# Altium PCB PCB2.PcbDoc
Units mil, origin at the board's own origin, x right, y up, seen from the top; angles counter-clockwise.
Board outline 4745 x 4000 mil, 2 copper layers (Top Layer, Bottom Layer); 73 components, 53 nets, 225 pads, 21 vias.
Unrouted connection lines stored in the file: 1.
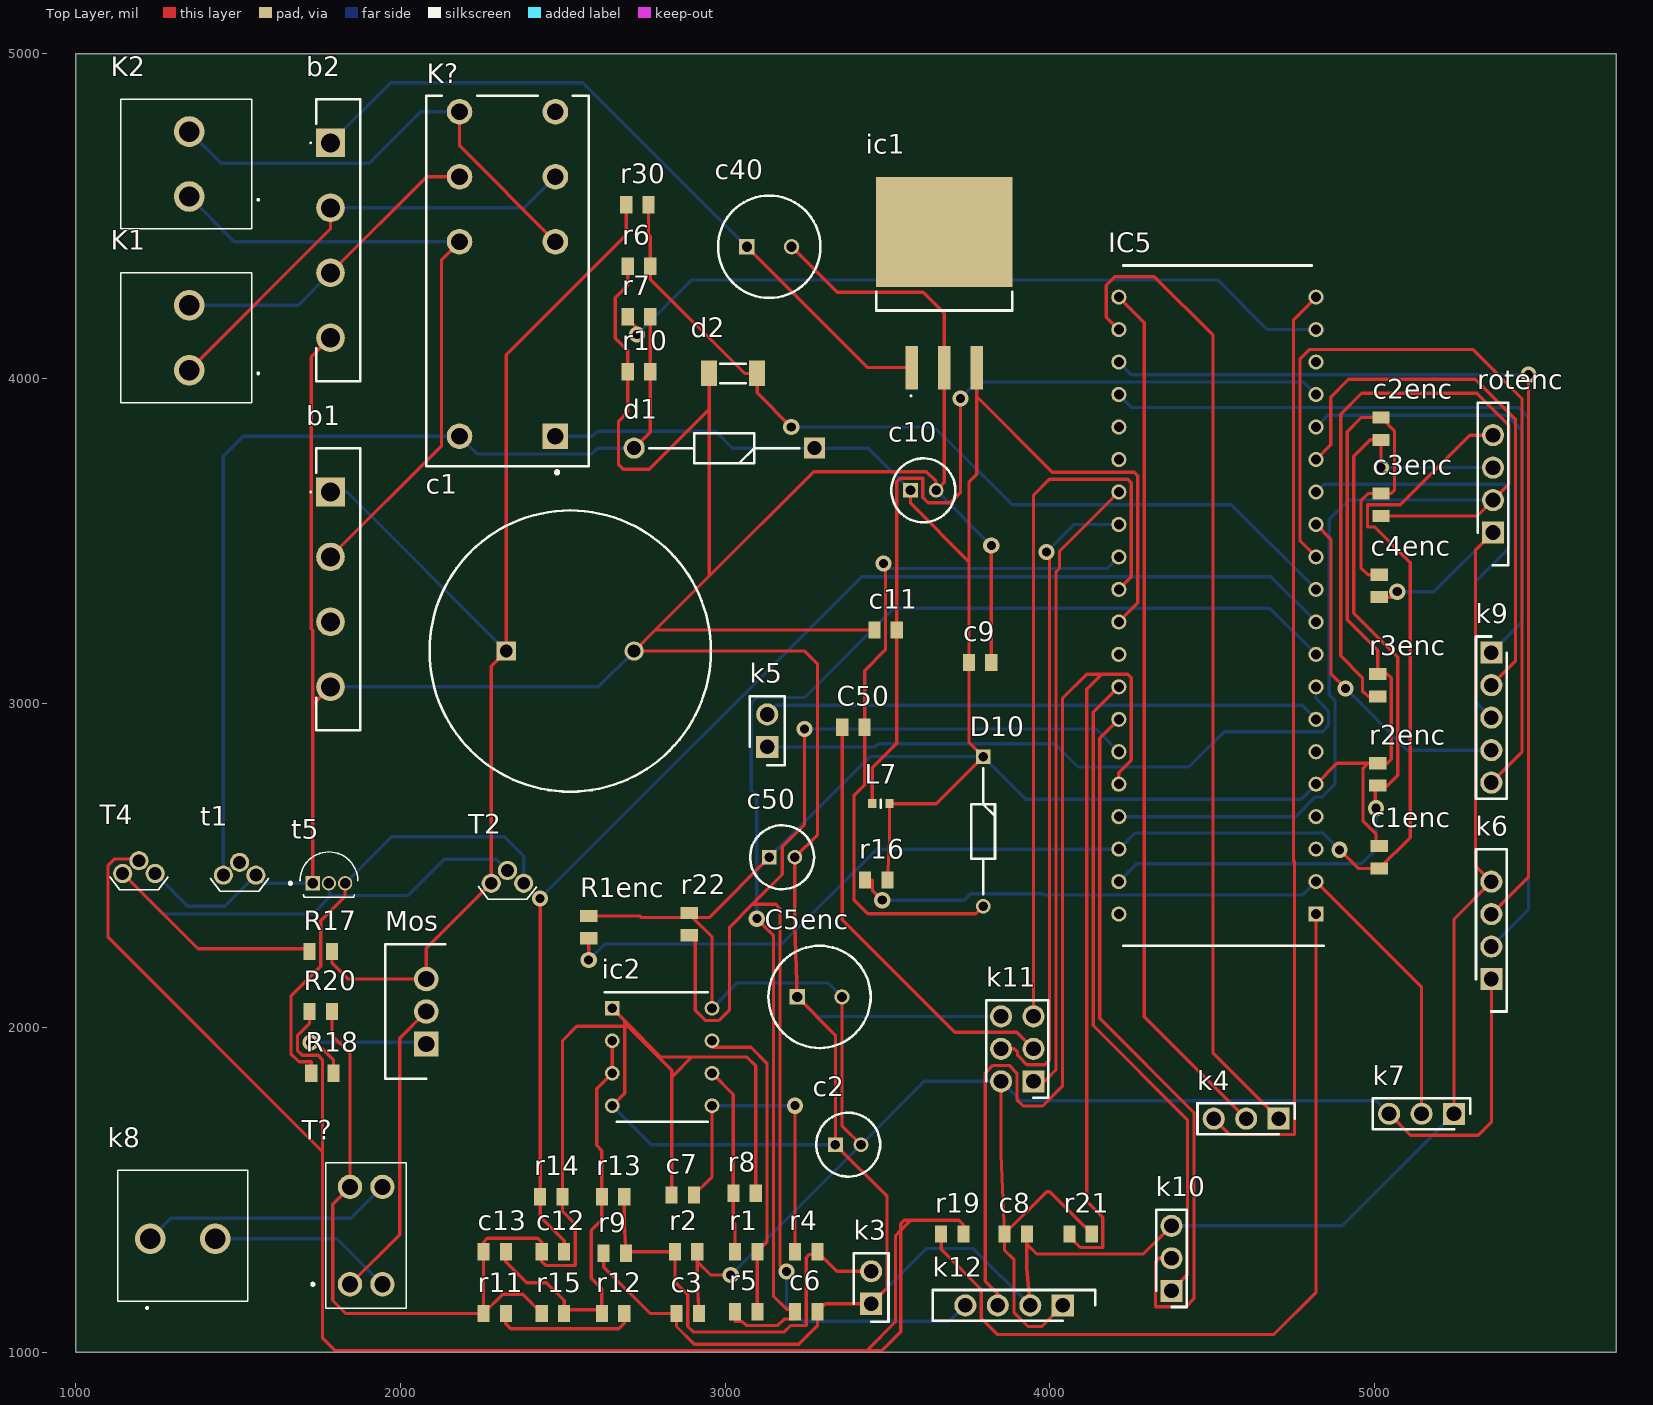
[diagram p0: Top Layer view]
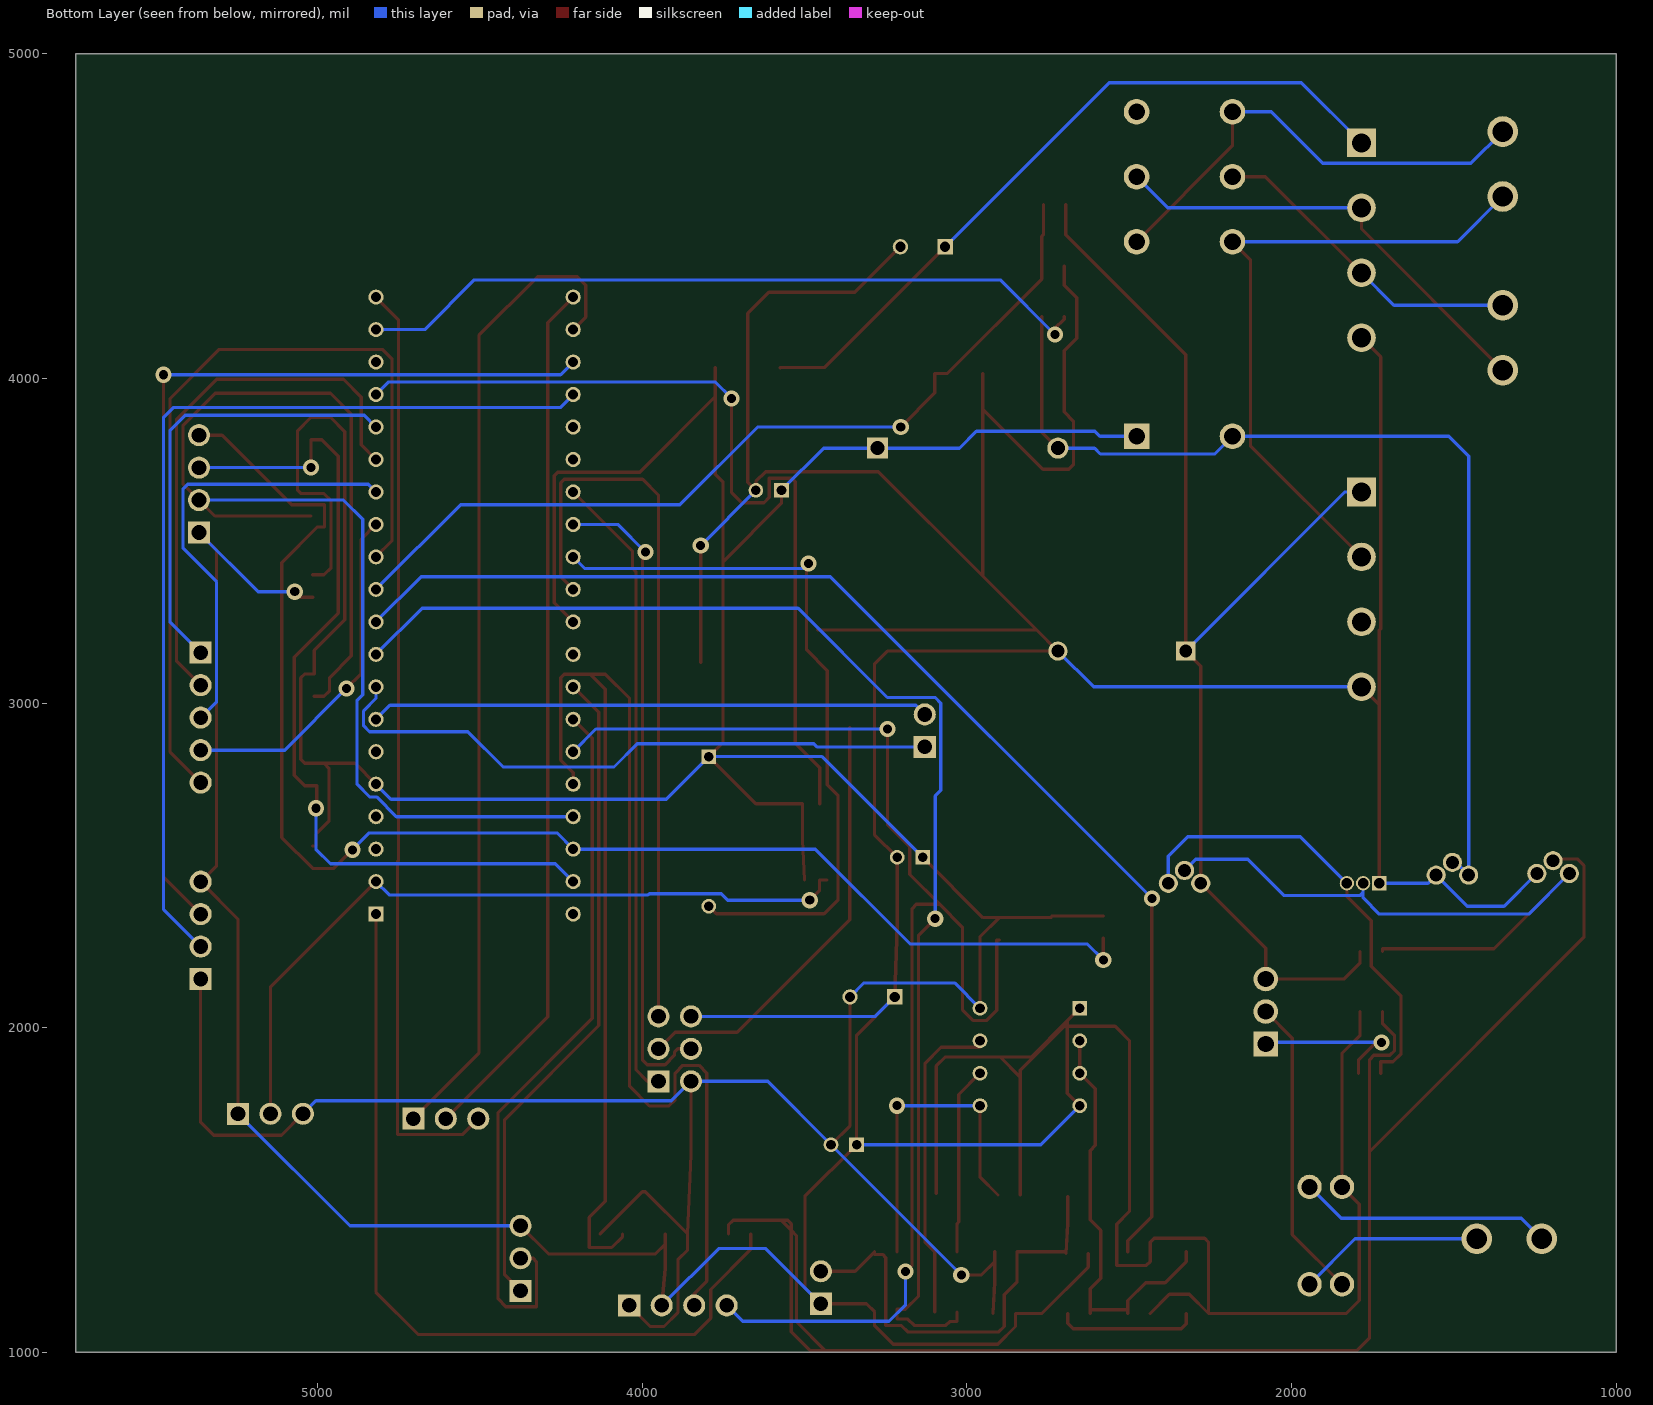
[diagram p1: Bottom Layer view, seen from below]
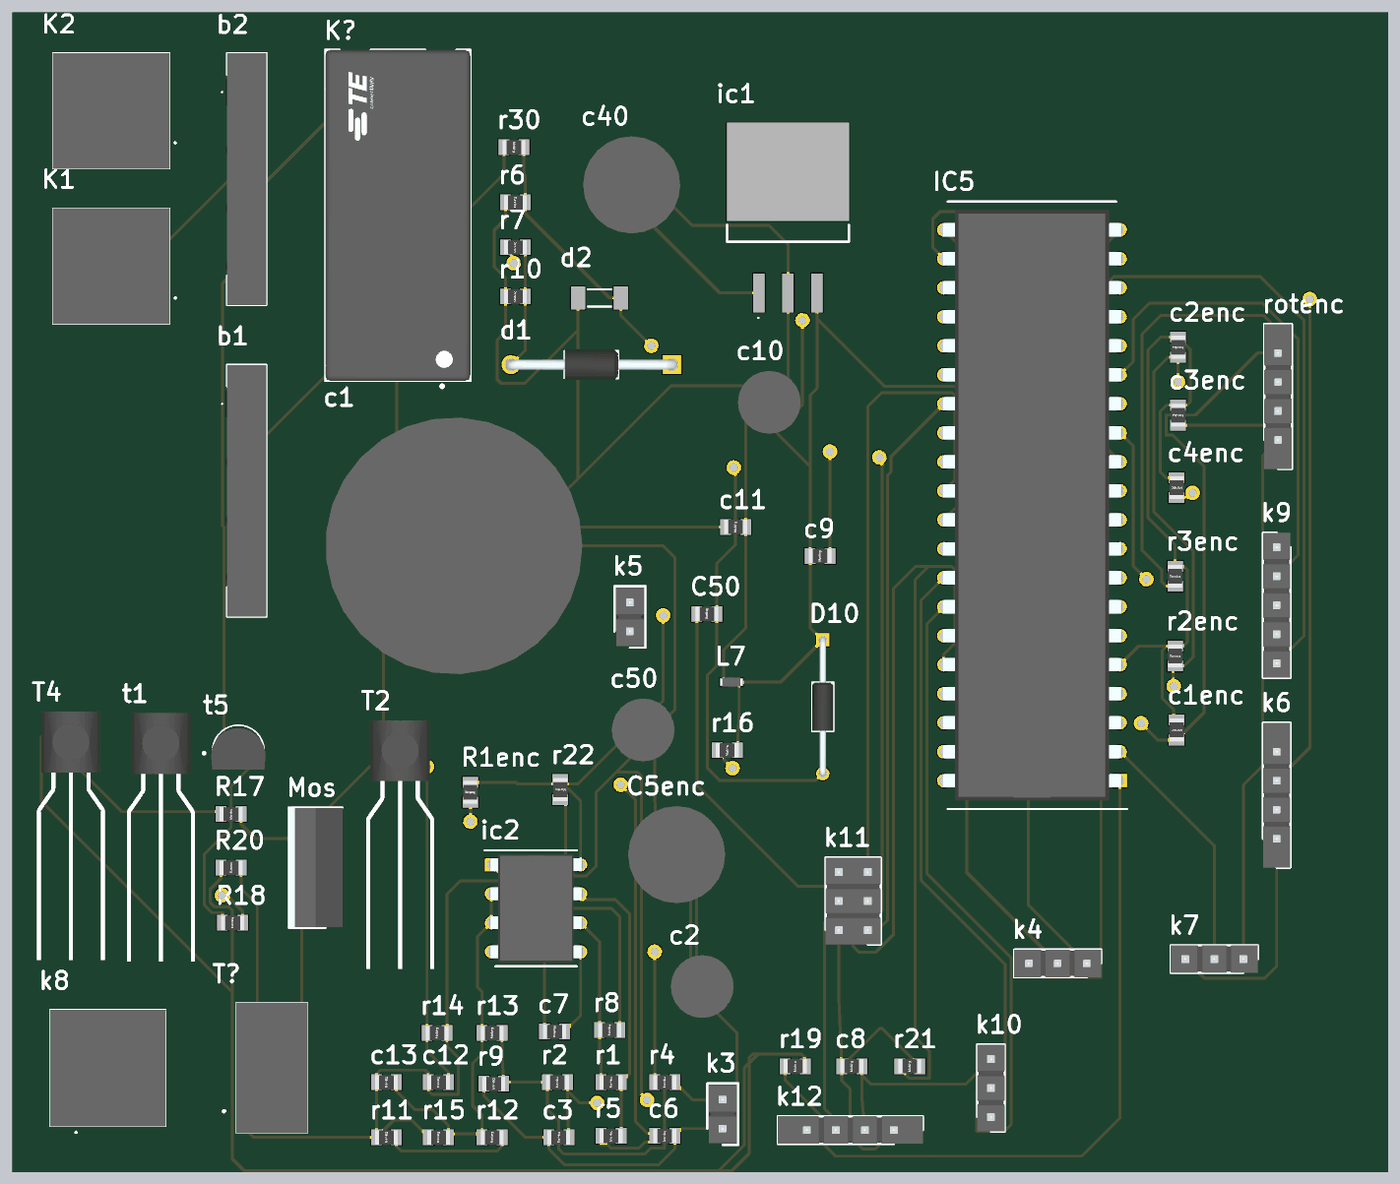
[diagram p2: 3D render of the assembled board from above, using the file's embedded part models]

## Layer stack, top to bottom
Top Solder: solder mask 0.4, Solder Resist, Dk 3.5
Top Layer: signal copper 1.4
Dielectric 1: dielectric 12.6, FR-4, Dk 4.8
Bottom Layer: signal copper 1.4
Bottom Solder: solder mask 0.4, Solder Resist, Dk 3.5

## Board outline
1000,1000 5745,1000 5745,5000 1000,5000

## Design rules (kind name [scope] priority, off if disabled: settings)
Clearance [All] p1: gap=10 ignorepadtopadclearanceinfootprint=FALSE except(0: Arc-Hole Track-Hole SMDPad-Hole THPad-Hole Via-Hole Fill-Hole Poly-Hole Region-Hole Text-Hole)
PolygonConnect [All] p1: connectstyle=Relief reliefconductorwidth=10 reliefentries=4 polygonreliefangle="90 Angle" airgapwidth=10
RoutingVias [All] p1: holewidth=28 width=50 viastyle="Through Hole" minholewidth=28 minwidth=50 maxholewidth=28 maxwidth=50
SolderMaskExpansion [All] p1: expansion=4 istentingtop=FALSE
Width [All] p1: maxlimit=10 minlimit=10 preferedwidth=10
30 further rules are at their usual default settings.

## Classes and differential pairs
component class deel4: c1enc c2enc c3enc c4enc C5enc c8 c9 c10 c11 C50 D10 IC5 k4 k5 k6 k7 k9 k10 k11 k12 L7 R1enc r2enc r3enc r16 r19 r21 r22 rotenc
component class deel3: c2 c3 c6 c7 c12 c13 ic2 k3 r1 r2 r4 r5 r8 r9 r11 r12 r13 r14 r15
component class deel2: b1 b2 c1 c40 c50 d1 d2 ic1 K1 K2 K? r6 r7 r10 r30 t1
component class deel1: k8 Mos R17 R18 R20 T2 T4 t5 T?

## Components (designator, comment, footprint, x,y, rotation, side; value= is the part's Value field where it differs from the comment)
b1 "bruggelijk" bruggelijk 1785,3650 r90 top
b2 "bruggelijk" bruggelijk 1785,4725 r90 top
c1 "elekcap4700uf" Elekcap4700uf 2326.3,3160 r0 top
c1enc "" 0805 5015,2525 r90 top
c2 "elekcap10uf" elekcap10uf 3340,1640 r0 top
c2enc "" 0805 5020,3845 r90 top
c3 "keramishecap" 0805 2885,1120 r0 top
c3enc "" 0805 5020,3610.55 r90 top
c4enc "" 0805 5015,3360.55 r90 top
C5enc "" elekcap100uf 3222.2,2095 r0 top
c6 "keramishecap" 0805 3250,1125 r0 top
c7 "keramishecap" 0805 2870,1485 r180 top
c8 "keramishecap" 0805 3895,1365 r0 top
c9 "keramishecap" 0805 3785.55,3125 r0 top
c10 "elekcap10uf" elekcap10uf 3571.26,3655 r0 top
c11 "keramishecap" 0805 3494.45,3225 r0 top
c12 "keramishecap" 0805 2470,1310 r0 top
c13 "keramishecap" 0805 2290.55,1310 r0 top
c40 "elekcap100uf" elekcap100uf 3067.2,4405 r0 top
C50 "keramishecap" 0805 3395.55,2925 r0 top (schematic designator C?)
c50 "elekcap10uf" elekcap10uf 3136.26,2525 r0 top
d1 "1N4007-B" 1n4007 3275.12,3785 r180 top
d2 "zenerdiode" zenerdiode 3025,4015 r180 top
D10 "1N4148" diode1N4148 3795,2835 r270 top (schematic designator D?)
ic1 "dcconv5v" dcconv5v 3675,4298.23 r0 top
ic2 "dualopam" dualopam 2806.26,1910 r0 top
IC5 "8bitmcu" 8bitmcu 4516.26,3300 r180 top (schematic designator IC?)
K1 "printkroonsteen" printkroonsteen 1350,4025 r90 top
K2 "printkroonsteen" printkroonsteen 1350,4560 r90 top
k3 "2pin" 2pin 3450,1150 r90 top
k4 "3pin" 3pin 4705,1720 r180 top
k5 "2pin" 2pin 3130,2865 r90 top
k6 "4pin" 4pin 5360,2150 r90 top
k7 "3pin" 3pin 5245,1735 r180 top
k8 "printkroonsteen" printkroonsteen 1230,1350 r0 top
k9 "5pin" 5pin 5360,3155 r270 top
k10 "3pin" 3pin 4375,1190 r90 top
k11 "6pin" 6pin 3950,1835 r90 top
k12 "display" 4pin 4040,1145 r180 top
K? "RT424005F" FP-RT424005F-MFG 2330,4300 r90 top
L7 "Smoorspoel" Smoorspoel 3480,2690 r0 top (schematic designator L?)
Mos "pmosfet" pmosfet 2080,1950 r90 top
r1 "18k" 0805 3065,1310 r0 top
R1enc "5mOhm" 0805 2580,2310 r90 top
r2 "1m" 0805 2880,1310 r0 top
r2enc "5mOhm" 0805 5010,2780 r90 top
r3enc "5mOhm" 0805 5010,3055 r90 top
r4 "5k6" 0805 3250,1310 r0 top
r5 "5k6" 0805 3065,1125 r0 top
r6 "10k" 0805 2735,4345 r0 top
r7 "10k" 0805 2735,4190 r0 top
r8 "100" 0805 3060,1490 r0 top
r9 "10m" 0805 2660.55,1305 r0 top
r10 "4k7" 0805 2735,4020 r0 top
r11 "18k" 0805 2290.55,1120 r0 top
r12 "18k" 0805 2655,1120 r0 top
r13 "5k6" 0805 2655,1480 r0 top
r14 "5k6" 0805 2465,1480 r0 top
r15 "100" 0805 2470,1120 r0 top
r16 "4k7" 0805 3465.55,2455 r0 top
R17 "4k7" 0805 1755,2235 r0 top
R18 "100" 0805 1760,1860 r0 top
r19 "10k" 0805 3700,1365 r0 top
R20 "4k7" 0805 1755,2050 r180 top
r21 "4k7" 0805 4095,1365 r0 top
r22 "4k7" 0805 2890,2319.45 r90 top
r30 "68k" 0805 2730,4535 r180 top
rotenc "4pin" 4pin 5365,3525 r90 top
t1 "" bc447 1455,2470 r0 top
T2 "BC547CTA" bc447 2280,2445 r0 top
T4 "BC547CTA" bc447 1145,2475 r0 top
t5 "BC557C" bc557c 1780,2445 r0 top
T? "Commonmodespoel" commonmodespoel 1845,1210 r0 top

## Footprints (in the part's own frame and the unit in brackets; to place one, negate y for a bottom-side part, rotate by r counter-clockwise, add the part's x,y. Pads: shape width x height; smd on the part's side, far side on the other; paste and mask are expansions set on the pad)
1n4007 [mm]
  rect 1.65x1.65 hole 1.1: 1(0,0)
  round 1.65 hole 1.1: 2(14.1,0)
  silkscreen extent 1.18,-1.18 12.92,1.18, body extent -0.45,-1.35 14.55,1.35, height 2.69
2pin [mm]
  rect 1.725x1.725 hole 1.15: 1(0,0)
  round 1.725 hole 1.15: 2(2.54,0)
  silkscreen extent -1.42,-1.35 3.96,1.35, body extent -1.27,-1.2 3.81,1.2, height 8.43
3pin [mm]
  rect 1.725x1.725 hole 1.15: 1(0,0)
  round 1.725 hole 1.15: 2(2.54,0) 3(5.08,0)
  silkscreen extent -1.27,-1.2 6.35,1.2, body extent -1.27,-1.2 6.35,1.2, height 8.58
4pin [mm]
  rect 1.725x1.725 hole 1.15: 1(0,0)
  round 1.725 hole 1.15: 2(2.54,0) 3(5.08,0) 4(7.62,0)
  silkscreen extent -2.54,-1.2 10.16,1.2, body extent -2.54,-1.2 10.16,1.2, height 8.58
5pin [mm]
  rect 1.725x1.725 hole 1.15: 1(0,0)
  round 1.725 hole 1.15: 2(2.54,0) 3(5.08,0) 4(7.62,0) 5(10.16,0)
  silkscreen extent -1.27,-1.2 11.43,1.2, body extent -1.27,-1.2 11.43,1.2, height 8.58
6pin [mm]
  rect 1.725x1.725 hole 1.15: 1(0,0)
  round 1.725 hole 1.15: 2(0,2.54) 3(2.54,0) 4(2.54,2.54) 5(5.08,0) 6(5.08,2.54)
  silkscreen extent -1.27,-1.14 6.35,3.68, body extent -1.27,-1.14 6.35,3.68, height 8.58
8bitmcu [mm]
  rect 1.184x1.184 hole 0.784: 1(-7.715,24.13)
  round 1.184 hole 0.784: 2(-7.715,21.59) 3(-7.715,19.05) 4(-7.715,16.51) 5(-7.715,13.97) 6(-7.715,11.43) 7(-7.715,8.89) 8(-7.715,6.35) 9(-7.715,3.81) 10(-7.715,1.27) 11(-7.715,-1.27) 12(-7.715,-3.81) 13(-7.715,-6.35) 14(-7.715,-8.89) 15(-7.715,-11.43) 16(-7.715,-13.97) 17(-7.715,-16.51) 18(-7.715,-19.05) 19(-7.715,-21.59) 20(-7.715,-24.13) 21(7.715,-24.13) 22(7.715,-21.59) 23(7.715,-19.05) 24(7.715,-16.51) 25(7.715,-13.97) 26(7.715,-11.43) 27(7.715,-8.89) 28(7.715,-6.35) 29(7.715,-3.81) 30(7.715,-1.27) 31(7.715,1.27) 32(7.715,3.81) 33(7.715,6.35) 34(7.715,8.89) 35(7.715,11.43) 36(7.715,13.97) 37(7.715,16.51) 38(7.715,19.05) 39(7.715,21.59) 40(7.715,24.13)
  silkscreen extent -8.31,-26.61 7.37,26.61, body extent -7.86,-25.88 7.86,25.88, height 6.35
0805 [mm] "Metal Plate Resistor, SMT, body size 2x1.25mm"
  rect 0.95x1.36 smd: 1(-0.875,0) 2(0.875,0)
  body extent -1,-0.62 1,0.63, height 0.35
bc447 [mm]
  round 1.5 hole 1.01: 1(0,0) 2(1.27,1) 3(2.54,0)
  silkscreen extent -1.02,-1.26 3.56,-0.24, body extent -1.51,-18.89 4.44,2.88, height 2.6
bc557c [mm]
  rect 1.12x1.12 hole 0.83: 1(-1.27,0)
  round 1.12 hole 0.83: 2(0,0) 3(1.27,0)
  silkscreen extent -3.11,-1.11 2.26,2.45, body extent -2.38,-1.43 2.38,2.19, height 5.33
bruggelijk [mm]
  rect 2.235x2.235 hole 1.49: 1(0,0)
  round 2.235 hole 1.49: 2(-5.08,0) 3(-10.16,0) 4(-15.24,0)
  silkscreen extent -18.65,-2.32 3.41,1.6, body extent -18.65,-2.32 3.4,1.11, height 18.9
commonmodespoel [mil]
  round 75 hole 50: 1(0,0) 2(100,0) 3(100,300) 4(0,300)
  silkscreen extent -118,-74 174,374, body extent -74,-74 174,374, height 378
dcconv5v [mm]
  rect 1x3.4 smd: 1(-2.54,-6.745) 2(0,-6.745) 3(2.54,-6.745)
  rect 10.7x8.6 smd: 4(0,3.855)
  silkscreen extent -5.33,-9 5.33,-0.8
diode1N4148 [mm]
  rect 1.15x1.15 hole 0.75: 1(0,0)
  round 1.15 hole 0.75: 2(11.7,0)
  silkscreen extent 0.93,-0.93 10.77,0.93, body extent -0.28,-0.92 11.93,0.92, height 1.84
dualopam [mm]
  rect 1.158x1.158 hole 0.758: 1(-3.905,3.81)
  round 1.158 hole 0.758: 2(-3.905,1.27) 3(-3.905,-1.27) 4(-3.905,-3.81) 5(3.905,-3.81) 6(3.905,-1.27) 7(3.905,1.27) 8(3.905,3.81)
  silkscreen extent -4.48,-5.08 3.56,5.08, body extent -4.04,-4.75 4.04,4.75, height 5.33
elekcap10uf [mm]
  rect 1.15x1.15 hole 0.75: 1(0,0)
  round 1.15 hole 0.75: 2(2,0)
  silkscreen extent -1.5,-2.5 3.5,2.5, body extent -1.75,-2.75 3.75,2.75, height 12.5
elekcap100uf [mm]
  rect 1.2x1.2 hole 0.8: 1(0,0)
  round 1.2 hole 0.8: 2(3.5,0)
  silkscreen extent -2.25,-4 5.75,4, body extent -2.5,-4.25 6,4.25, height 12.5
Elekcap4700uf [mm]
  rect 1.5x1.5 hole 1: 1(0,0)
  round 1.5 hole 1: 2(10,0)
  silkscreen extent -6,-11 16,11, body extent -6.25,-11.25 16.25,11.25, height 37
FP-RT424005F-MFG [mm]
  round 2 hole 1.3 paste-1000 mask+0: 11(8.15,-3.75) 12(3.07,-3.75) 14(13.23,-3.75) 21(8.15,3.75) 22(3.07,3.75) 24(13.23,3.75) A2(-12.15,3.75)
  rect 2x2 hole 1.3 paste-1000 mask+0: A1(-12.15,-3.75)
  silkscreen extent -15.1,-6.35 14.5,6.35, body extent -14.6,-6.45 14.6,6.45, height 0.25
pmosfet [mm]
  rect 1.92x1.92 hole 1.28: 1(0,0)
  round 1.92 hole 1.28: 2(2.54,0) 3(5.08,0)
  silkscreen extent -2.73,-1.49 7.81,3.2, body extent -2.67,-1.5 7.75,3.19, height 18.84
printkroonsteen [mm]
  round 2.4 hole 1.6: 1(0,0) 2(5.08,0)
  silkscreen extent -2.54,-5.45 7.62,5.35, body extent -2.54,-4.9 7.62,5.35, height 14.1
Smoorspoel [mm]
  rect 0.65x0.7 smd: 1(-0.675,0) 2(0.675,0)
  silkscreen extent 0,-0.3 0,0.3, body extent -0.93,-0.4 0.93,0.4, height 1
zenerdiode [mm]
  rect 1.25x2 smd: 1(-1.875,0) 2(1.875,0)
  silkscreen extent -1,-0.75 1,0.75

## Part data
b1 b2: "Bridge Rectifier", Manufacturer_Name=Vishay, Manufacturer_Part_Number=GBU6J-E3/45, Datasheet Link=http://www.vishay.com/docs/88615/gbu6a.pdf, Height=18.8mm
c1: "Capacitor Polarised", Manufacturer_Name=Kemet, Manufacturer_Part_Number=ESK478M050AQ3AA, Mouser2 Part Number=80-ESK478M050AQ3AA, Datasheet Link=https://componentsearchengine.com//ESK478M050AQ3AA.pdf, Height=37mm, Mouser2 Price/Stock=https://www.mouser.com/Search/Refine.aspx?Keyword=80-ESK478M050AQ3AA
c1enc c2enc c3enc c4enc: library part keramishecap, "Capacitor", Manufacturer_Name=Kemet, Manufacturer_Part_Number=C1206C104K3GACAUTO, Datasheet Link=https://www.kemet.com/specsheet/C1206C104K3GACAUTO, Height=1.8mm
c2 c10 c50: "Capacitor Polarised", Manufacturer_Name=Panasonic, Manufacturer_Part_Number=EEU-FR1H100, Mouser2 Part Number=667-EEU-FR1H100, Datasheet Link=https://componentsearchengine.com//EEU-FR1H100.pdf, Height=12.5mm, Mouser2 Price/Stock=https://www.mouser.com/Search/Refine.aspx?Keyword=667-EEU-FR1H100
c3 c6 c7 c8 c9 c11 c12 c13 C50: "Capacitor", Manufacturer_Name=Kemet, Manufacturer_Part_Number=C1206C104K3GACAUTO, Datasheet Link=https://www.kemet.com/specsheet/C1206C104K3GACAUTO, Height=1.8mm
C5enc: library part elekcap100uf, "Capacitor Polarised", Manufacturer_Name=Kemet, Manufacturer_Part_Number=ESH107M050AG3KA, Datasheet Link=https://connect.kemet.com:7667/gateway/IntelliData-ComponentDocumentation/1.0/download/specsheet/ESH107M050AG3KA, Height=12.5mm
c40: "Capacitor Polarised", Manufacturer_Name=Kemet, Manufacturer_Part_Number=ESH107M050AG3KA, Datasheet Link=https://connect.kemet.com:7667/gateway/IntelliData-ComponentDocumentation/1.0/download/specsheet/ESH107M050AG3KA, Height=12.5mm
d1: "Diode", Manufacturer_Name=Rectron, Datasheet Link=https://www.arrow.com/en/products/1n4007-b/rectron, Manufacturer_Part_Number=1N4007-B
d2: "Zener Diode", Manufacturer_Name=Vishay, Manufacturer_Part_Number=TZMC5V1-GS08, Datasheet Link=https://componentsearchengine.com/Datasheets/2/TZMC5V1-GS08.pdf, Height=1.6mm
D10: "Diode", Manufacturer_Name=Nexperia, Datasheet Link=https://datasheet.datasheetarchive.com/originals/distributors/Datasheets-112/DSAP0040891.pdf, Manufacturer_Part_Number=1N4148
ic1: "Integrated Circuit", Manufacturer_Name="Texas Instruments", Manufacturer_Part_Number=TL780-05CKTTR, Datasheet Link=http://www.ti.com/general/docs/suppproductinfo.tsp?distId=26&gotoUrl=http%3A%2F%2Fwww.ti.com%2Flit%2Fgpn%2Ftl780, Height=5.08mm
ic2: "Integrated Circuit", Manufacturer_Name=Microchip, Manufacturer_Part_Number=MCP6002-E/P, Mouser2 Part Number=579-MCP6002-E/P, Datasheet Link=https://componentsearchengine.com//MCP6002-E_P.pdf, Height=5.334mm, Mouser2 Price/Stock=https://www.mouser.com/Search/Refine.aspx?Keyword=579-MCP6002-E%2FP
IC5: "Integrated Circuit", Manufacturer_Name=Microchip, Manufacturer_Part_Number=ATMEGA4809-PF, Mouser2 Part Number=556-ATMEGA4809-PF, Datasheet Link=https://componentsearchengine.com//ATMEGA4809-PF.pdf, Height=6.35mm, Mouser2 Price/Stock=https://www.mouser.com/Search/Refine.aspx?Keyword=556-ATMEGA4809-PF
K1 K2 k8: "Connector", Manufacturer_Name="CUI Inc.", Manufacturer_Part_Number=TB007-508-02BE, Mouser2 Part Number=490-TB007-508-02BE, Datasheet Link=https://componentsearchengine.com//TB007-508-02BE.pdf, Height=14mm, Mouser2 Price/Stock=https://www.mouser.com/Search/Refine.aspx?Keyword=490-TB007-508-02BE
k3 k5: "Connector", Manufacturer_Name=Amphenol, Manufacturer_Part_Number=10129378-902001BLF, Datasheet Link=https://www.mouser.co.uk/datasheet/2/18/10129378-1530218.pdf, Height=8.43mm
k4 k7 k10: "Connector", Manufacturer_Name=Amphenol, Manufacturer_Part_Number=10129378-903001BLF, Height=8.58mm
k6 rotenc: "Connector", Manufacturer_Name=Amphenol, Manufacturer_Part_Number=10129378-904001BLF, Datasheet Link=https://cdn.amphenol-icc.com/media/wysiwyg/files/drawing/10129378.pdf, Height=8.58mm
k9: "Connector", Manufacturer_Name="FCI Electronics", Manufacturer_Part_Number=10129378-905001BLF, Datasheet Link=https://cdn.amphenol-icc.com/media/wysiwyg/files/drawing/10129378.pdf, Height=8.58mm
k11: "Connector", Manufacturer_Name=Amphenol, Manufacturer_Part_Number=10129381-906002BLF, Mouser2 Part Number=649-1012938190602BLF, Datasheet Link=https://componentsearchengine.com//10129381-906002BLF.pdf, Height=8.58mm, Mouser2 Price/Stock=https://www.mouser.com/Search/Refine.aspx?Keyword=649-1012938190602BLF
k12: library part 4pin, "Connector", Manufacturer_Name=Amphenol, Manufacturer_Part_Number=10129378-904001BLF, Datasheet Link=https://cdn.amphenol-icc.com/media/wysiwyg/files/drawing/10129378.pdf, Height=8.58mm
K?: library part CMP-03395-000296-1, "RELAY GENERAL PURPOSE DPDT 8A 5V", Coil Current=80.6mA, Coil Power=500mW, Coil Resistance=62R, Coil Voltage (DC)=5V, Contact Current Rating=8A, Contact Voltage Rating (AC)=250V, Dropout Voltage=500mV, Max Operating Temperature=85°C, Max Voltage Rating (AC)=400V, Min Operating Temperature=-40°C, Package Quantity=5000, Power Consumption=400mW, Coil Type=Non-Latching, Contact Material=Silver, ELV=Compliant, Height=15.7mm, Lead Free="Lead Free", Length=29mm, Mount="Through Hole", Operate Time=7ms, Packaging=Carton, Radiation Hardening=No, Relay Type="General Purpose", Release Time=3ms, RoHS Compliant=Yes, Series=RT2, Termination=PCB, Throw Configuration=DPDT, Weight=13g, Width=12.7mm
L7: "Inductor", Manufacturer_Name="Murata Electronics", Manufacturer_Part_Number=LQM18FN1R0M00D, Datasheet Link=https://psearch.en.murata.com/inductor/product/LQM18FN1R0M00%23.html, Height=0.9mm
Mos: "MOSFET (P-Channel)", Manufacturer_Name=Infineon, Manufacturer_Part_Number=IRF9Z34NPBF, Mouser2 Part Number=942-IRF9Z34NPBF, Datasheet Link=https://componentsearchengine.com//IRF9Z34NPBF.pdf, Height=4.69mm, Mouser2 Price/Stock=https://www.mouser.com/Search/Refine.aspx?Keyword=942-IRF9Z34NPBF
r1 r2 r4 r5 r6 r7 r8 r9 r10 r11 r12 r13 r14 r15 r16 R17 R18 r19 R20 r21 r22 r30: library part weerstand0805, "WRIS-PSMB SMT Metal Plate Resistor, size 0805, 5mOhm, 0.5W", Manufacturer="Wurth Elektronik", Manufacturer Part Number=580060720003, Operating Temperature="-55 to +155degC", Rated Current=10A, Rated Power=0.5W, Resistance=5mOhm, Resistance Tolerance=+/-1%, Temperature Coefficient of Resistance=+/-100ppm/degC, ComponentLink1Description=Manufacturer, ComponentLink1URL=http://www.we-online.de, ComponentLink2Description=Datasheet, ComponentLink2URL=https://www.we-online.com/catalog/datasheet/580060720003.pdf, Height=0.35mm, Length=2mm, Mounting Technology=SMT, Packaging="Tape and Reel", Published Date="May 2020", Size=0805, Technical Reference=MB0805R005F102KAATP0000, Width=1.25mm
R1enc r2enc r3enc: library part weerstand0805, "WRIS-PSMB SMT Metal Plate Resistor, size 0805, 5mOhm, 0.5W", Manufacturer="Wurth Elektronik", Manufacturer Part Number=580060720003, Operating Temperature="-55 to +155degC", Rated Current=10A, Rated Power=0.5W, Resistance Tolerance=+/-1%, Temperature Coefficient of Resistance=+/-100ppm/degC, ComponentLink1Description=Manufacturer, ComponentLink1URL=http://www.we-online.de, ComponentLink2Description=Datasheet, ComponentLink2URL=https://www.we-online.com/catalog/datasheet/580060720003.pdf, Height=0.35mm, Length=2mm, Mounting Technology=SMT, Packaging="Tape and Reel", Published Date="May 2020", Resistance=5mOhm, Size=0805, Technical Reference=MB0805R005F102KAATP0000, Width=1.25mm
t1: library part BC547CTA, "Transistor BJT NPN", Manufacturer_Name="ON Semiconductor", Datasheet Link=http://www.onsemi.com/pub/Collateral/BC550-D.pdf, Manufacturer_Part_Number=BC547CTA
T2 T4: "Transistor BJT NPN", Manufacturer_Name="ON Semiconductor", Datasheet Link=http://www.onsemi.com/pub/Collateral/BC550-D.pdf, Manufacturer_Part_Number=BC547CTA
t5: "Bipolar (BJT) Transistor PNP 30V 100mA 150MHz 500mW Through Hole TO-92-3", Package=None, Availability=Unavailable, MP=BC557CZL1G, Price=None
T?: "Transformer", Manufacturer_Name="Laird Technologies", Manufacturer_Part_Number=CM2545X171B-10, Datasheet Link=https://datasheet.datasheetarchive.com/originals/dk/DKDS-7/122753.pdf, Height=9.5mm

## Via types
v1: diameter 50, hole 28, Top Layer to Bottom Layer, 21 vias

## Nets (pads, with @x,y where several pads share a name; then routed paths per layer and width w, separated by ;. In a path a pad name is that pad's centre, name@x,y a point inside that pad or via, vN(x,y) a via of type N, cw(c..) or ccw(c..) an arc to the next point about the centre after c; other vN are vias at no path point)
+5: c1enc.2 c2.2 c2enc.2 c3.2 c3enc.2 c4enc.2 C5enc.2 c8.1 c9.1 c10.1 c50.1 d1.1 D10.1 ic1.3 ic2.8 IC5.5 IC5.31 k6.1 k7.3 k11.2 k12.1 K?.A1 L7.2 R1enc.2 r2.2 r2enc.2 r3enc.2 r16.2 r21.2 r22.2 | length 15212.9
  Top Layer w10: R1enc.2 2737,2344.45 2742,2339.45 r22.2@2900,2339.45 ; r2.2 2914.45,1280 ; c3.2 2914.45,1217 2914.45,1280 ; ic2.8 2960,2279.45 r22.2@2900,2339.45 ; v1(3017.37,1238.63) 2955.82,1238.63 2914.45,1280 ; c50.1 2950.71,2339.45 r22.2@2900,2339.45 ; C5enc.2 3360,1698.74 c2.2 ; r16.2 3506.57,2578.57 L7.2 3650,2690 D10.1 3751.1,2878.9 c9.1 3751.1,3435.46 ; c10.1 3571.26,3615.3 3751.1,3435.46 ; ic1.3 3775,3944 ; k11.2 3850,1610.55 c8.1 ; k12.1 3975,1080 3933,1080 3890,1123 3890,1285.55 3860.55,1315 c8.1 ; r21.2 3999.45,1495 3990.55,1495 c8.1 ; IC5.31 4271,3308.48 4271,3700 4260,3711 4008,3711 3775,3944 ; IC5.5 4884.45,2814.45 4980,2814.45 ; c1enc.2 5005,2559.45 5005,2595.43 4964.94,2635.49 4964.94,2799.38 4980,2814.45 ; c4enc.2 4980,3395 4958.23,3416.77 4958.23,3623.23 4980,3645 c3enc.2 5050,3645 5062,3657 5062,3837.45 c2enc.2 4960,3879.45 4916,3835.45 4916,3256 5010,3162 r3enc.2 5040,3089.45 5052,3077.45 5052,2826.45 5040,2814.45 r2enc.2 4980,2814.45 ; k7.3 5111,1669 5320,1669 5360,1709 k6.1 ; 3751.1,3435.46 3751.1,3680.1 3775,3704 3775,3944
  Bottom Layer w10: K?.A1 2590.65,3821.65 2606,3837 2971,3837 3023,3785 d1.1 3441.26,3785 c10.1 ; ic2.8 3038,2138 3317,2138 C5enc.2 ; v1(3017.37,1238.63) c2.2 3613.74,1835 k11.2 3910,1775 5005,1775 k7.3 ; c50.1 3446.26,2835 D10.1 3926,2704 4774,2704 IC5.5
GND: b1.4 b2.4 c1.2 c2.1 c3.1 c4enc.1 C5enc.1 c6.2 c7.2 c8.2 c9.2 c10.2 c11.1 c12.1 c13.1 c40.2 c50.2 d2.2 ic1.2 ic2.1 ic2.4 k3.1 k6.4 k7.1 k10.3 k11.6 k12.2 r6.1 r8.2 r9.1 r10.1 r11.1 r14.2 r15.1 R20.1 rotenc.1 t1.3 T4.3 t5.1 T?.4 | length 23408.3
  Top Layer w10: t5.1 1730,2995 ; b1.4 1730,2995 ; b2.4 1726,4066 1726,3228 1730,3224 1730,2995 ; R20.1 1789.45,1977 1845,1921.45 T?.4 1792,1457 1792,1160 1832,1120 r11.1 ; r15.1 2376.55,1179 2315.1,1179 r11.1 ; r9.1 2626.1,1263 2769.1,1120 c3.1 2850.55,1080 2905.55,1025 3227.45,1025 3284.45,1082 c6.2 3309.45,1150 k3.1 3499,1199 3499,1481 c2.1 3340,1977.2 C5enc.1 3215,2317.2 c50.2 3285,2595 3285,3120 3245,3160 c1.2 2785,3225 ; ic2.4 2691,1798.48 2691,2004.45 ; ic2.1 2691,2021.52 ; r6.1 2700.55,4286.55 2662,4248 2662,4123.55 2700.55,4085 r10.1 2700.55,3897 2672,3868.45 2672,3734.18 2686.18,3720 2766.18,3720 2951.18,3905 ; c7.2 2835.55,1847.55 ; d2.2 2951.18,3905 ; r8.2 3094.45,1882.55 3067,1910 2898,1910 ; c40.2 3345,4265 3610,4265 3675,4200 ic1.2 3675,3680 c10.2 3650,3682.64 3620,3712.64 3272.64,3712.64 2951.18,3391.18 ; c11.1 2785,3225 ; c9.2 v1(3820,3485) ; c8.2 3929.45,1333.55 ; k12.2 3929.45,1259.55 3929.45,1333.55 ; k10.3 4288.23,1303.23 3959.77,1303.23 3929.45,1333.55 ; c4enc.1 5053.1,3326.1 v1(5070,3343) ; k7.1 5245,2335 k6.4 5311,2499 5311,3471 rotenc.1 ; r11.1 c13.1 2256.1,1340 2268.1,1352 2423.55,1352 2435.55,1340 c12.1 2435.55,1280 2447.55,1268 2539,1268 2539,1395 2499.45,1434.55 r14.2 2499.45,1960 2543.9,2004.45 2691,2004.45 ; 2691,2004.45 2700.55,2004.45 2835.55,1869.45 2835.55,1847.55 ; 2691,2004.45 2691,2021.52 ; 2691,2021.52 2802.52,1910 2898,1910 ; 2785,3225 2951.18,3391.18 ; 2835.55,1847.55 2898,1910 ; 2951.18,3391.18 2951.18,3905
  Bottom Layer w10: T4.3 1346,2374 1459,2374 t1.3 1580,2445 t5.1 ; b1.4 2610,3050 c1.2 ; ic2.4 2772.52,1640 c2.1 ; C5enc.1 3282.2,2035 k11.6 ; k3.1 3620,1320 3765,1320 k12.2 ; c10.2 v1(3820,3485) ; k10.3 4900,1390 k7.1 ; v1(5070,3343) 5183,3343 rotenc.1
Netb1_2: b1.2 K2.1 K?.22 | length 2025.5
  Top Layer w10: b1.2 2127,3792 2127,4365.5 K?.22
  Bottom Layer w10: K2.1 1489.13,4420.87 K?.22
Netb1_3: b1.3 b2.2 K1.1 K?.11 | length 1412.5
  Top Layer w10: K1.1 1785,4460 b2.2
  Bottom Layer w10: b2.2 2381.77,4525 K?.11
Netb2_1: b2.1 c40.1 ic1.1 | length 2230.2
  Top Layer w10: c40.1 3439.2,4033 3575,4033 ic1.1
  Bottom Layer w10: b2.1 1970,4910 2562.2,4910 c40.1
Netb2_3: b2.3 K1.2 K?.21 | length 996.3
  Top Layer w10: b2.3 2080.87,4620.87 K?.21
  Bottom Layer w10: K1.2 1685,4225 b2.3
Netc1enc_1: c1enc.1 IC5.38 R1enc.1 rotenc.4 | length 4411.4
  Top Layer w10: v1(2580,2209) R1enc.1 ; v1(4892.55,2548) 4950,2490.55 c1enc.1 5110,2585.55 5110,3432.4 5000,3542.4 4978.23,3542.4 4978.23,3611 5080,3611 5294,3825 rotenc.4
  Bottom Layer w10: v1(2580,2209) 2629,2258 3175,2258 3467,2550 IC5.38 4262.52,2600 4840.55,2600 v1(4892.55,2548)
Netc2enc_1: c2enc.1 IC5.39 r2enc.1 rotenc.3 | length 2688.2
  Top Layer w10: v1(5005,2676) 5002,2679 5002,2745.55 r2enc.1 5040,2745.55 5072,2777.55 5072,3141 4936,3277 4936,3760 4986.55,3810.55 c2enc.1 v1(5020,3725)
  Bottom Layer w10: IC5.39 4267.52,2505 4960,2505 5005,2550 v1(5005,2676) ; v1(5020,3725) rotenc.3
Netc3enc_1: c3enc.1 IC5.37 r3enc.1 rotenc.2 | length 4194.6
  Top Layer w10: r3enc.1 4980,3020.55 4963,3037.55 4963,3078.44 4896,3145.44 4896,3890 4960,3954 5315.18,3954 5414,3855.18 5414,3674 rotenc.2 5316.1,3576.1 c3enc.1
  Bottom Layer w10: IC5.37 4757,2650 4818,2711 4840,2711 4878.31,2749.31 4878.31,3008.31 4861,3025.62 4861,3566 4920,3625 rotenc.2
Netc6_1: c6.1 IC5.9 r5.1 | length 4114.4
  Top Layer w10: r5.1 3030.55,1095.23 3053,1095.23 3065,1083.23 3162,1083.23 3181.77,1103 3215.55,1103 c6.1 3215.55,1133 3190,1133 3149,1174 3149,2285 v1(3098,2336)
  Bottom Layer w10: v1(3098,2336) 3098,2714 3081,2731 3081,3000 3098,3017 3245,3017 3520,3292 4678,3292 IC5.9
Netc7_1: c7.1 ic2.5 r4.1 | length 1003.6
  Top Layer w10: c7.1 2960,1540.55 ic2.5 ; r4.1 v1(3215.55,1760)
  Bottom Layer w10: ic2.5 v1(3215.55,1760)
Netc11_2: c11.2 IC5.17 L7.1 | length 2724.8
  Top Layer w10: L7.1 3453.43,2801 3528.9,2876.47 c11.2 3528.9,3681.54 3540,3692.64 3608.9,3692.64 3608.9,3633.1 3625,3617 3694,3617 3725,3648 v1(3725,3938)
  Bottom Layer w10: v1(3725,3938) 3776,3989 4781,3989 IC5.17
Netc12_2: c12.2 IC5.10 r14.1 | length 3976.9
  Top Layer w10: v1(2430,2398) 2430.55,2397.45 r14.1 2430.55,1417.9 2504.45,1344 c12.2
  Bottom Layer w10: v1(2430,2398) 3421,3389 4681,3389 IC5.10
Netc13_2: c13.2 ic2.2 ic2.3 r12.1 r13.1 r15.2 | length 1308.6
  Top Layer w10: c13.2 2325,1280 2390,1215 2449.45,1215 2504.45,1160 r15.2@2504.45,1131.93 ; r15.2 r15.2@2504.45,1131.93 ; r12.1 r12.1@2620.55,1131.93 ; ic2.2 ic2.3 2604.65,1812.13 2604.65,1637.8 2620.55,1621.9 r13.1 2620.55,1408.55 2588,1376 2588,1228.55 2620.55,1196 r12.1@2620.55,1131.93 ; r15.2@2504.45,1131.93 r12.1@2620.55,1131.93
NetC50_1: C50.1 k11.3 | length 1345.8
  Top Layer w10: C50.1 3361.1,2332.9 3708,1986 3899,1986 k11.3
NetC50_2: C50.2 D10.2 IC5.29 | length 2249.9
  Top Layer w10: v1(3488,3430) 3494,3424 3494,3164 3430,3100 C50.2 3430,2748 3397,2715 3397,2394 3440,2351 3771.63,2351 D10.2
  Bottom Layer w10: v1(3488,3430) 3503.66,3414.34 4176.86,3414.34 IC5.29
Netd1_2: d1.2 K?.A2 r7.2 r10.2 t1.1 t1.2 | length 3102.4
  Top Layer w10: d1.2 2769.45,3834.45 r10.2 r7.2
  Bottom Layer w10: t1.2 1494.37,2509.37 t1.1 1455,3760 1516.65,3821.65 K?.A2 2237.02,3767 2589,3767 2607,3785 d1.2
Netd2_1: d2.1 IC5.11 r6.2 r30.1 | length 2712.9
  Top Layer w10: r30.1 2764.45,4442 2769.45,4437 r6.2 2769.45,4305.55 3060,4015 d2.1 3098.82,3955.18 v1(3204,3850)
  Bottom Layer w10: v1(3204,3850) 3645,3850 3884,3611 4559,3611 IC5.11
Netic2_6: ic2.6 r1.1 r8.1 | length 579.2
  Top Layer w10: ic2.6 3025.55,1794.45 r8.1 3025.55,1402 3030.55,1397 r1.1
Netic2_7: ic2.7 r1.2 r5.2 | length 987.5
  Top Layer w10: ic2.7 2960,1940 3080,1940 3129,1891 3129,1339.55 r1.2 r5.2
NetIC5_1: IC5.1 r19.1 | length 2580.5
  Top Layer w10: r19.1 3665.55,1317.41 3788.96,1194 3788.96,1106.04 3840,1055 4689,1055 4820,1186 IC5.1
NetIC5_2: IC5.2 k7.2 r16.1 | length 2309.9
  Top Layer w10: r16.1 3454,2455 3454,2423 v1(3484,2393) ; IC5.2 5145,2125 k7.2
  Bottom Layer w10: v1(3484,2393) 3737,2393 3757,2413 3978,2413 3982,2409 4779,2409 IC5.2
NetIC5_7: IC5.7 k5.2 | length 1719.4
  Bottom Layer w10: k5.2 3158,2993 4777,2993 IC5.7
NetIC5_8: IC5.8 k5.1 | length 1950.7
  Bottom Layer w10: k5.1 3462,2865 3472,2875 4015,2875 4087,2803 4428,2803 4536.69,2911.69 4840,2911.69 4858.31,2930 4858.31,2975.69 4820,3014 IC5.8
NetIC5_12: IC5.12 k9.5 | length 2609.7
  Top Layer w10: IC5.12 4771,3499 4771,4060 4800,4089 5302.79,4089 5454,3937.79 5454,2849 k9.5
NetIC5_13: IC5.13 k9.4 | length 1070.4
  Top Layer w10: IC5.13 4866,3504 4866,3090 v1(4911,3045)
  Bottom Layer w10: v1(4911,3045) 5101,2855 k9.4
NetIC5_14: IC5.14 k9.3 | length 1377.6
  Bottom Layer w10: IC5.14 4843.96,3673.96 5400,3673.96 5413.96,3660 5413.96,3476.04 5311,3373.08 5311,3004 k9.3
NetIC5_15: IC5.15 k9.2 | length 1703
  Top Layer w10: IC5.15 4865,3795 4865,3942 4920,3997 5311,3997 5434,3874 5434,3129 k9.2
NetIC5_16: IC5.16 k9.1 | length 1391.9
  Bottom Layer w10: IC5.16 4856,3886 5408,3886 5454,3840 5454,3249 k9.1
NetIC5_19: IC5.19 r7.1 | length 2290.7
  Top Layer w10: r7.1 2700.55,4182 2729,4153.55 v1(2729,4135)
  Bottom Layer w10: v1(2729,4135) 2897,4303 4517,4303 4670,4150 IC5.19
NetIC5_20: IC5.20 k4.3 | length 2878.1
  Top Layer w10: k4.3 4554,1671 4754,1671 4754,2511 4751,2514 4751,4181 IC5.20
NetIC5_21: IC5.21 k4.2 | length 2692.6
  Top Layer w10: IC5.21 4291,4171.52 4291,2034 k4.2
NetIC5_22: IC5.22 k4.1 | length 3063.4
  Top Layer w10: IC5.22 4174,4188.52 4174,4287 4200,4313 4322,4313 4503,4132 4503,1922 k4.1
NetIC5_23: IC5.23 k6.3 | length 2985.9
  Top Layer w10: k6.3 5474,2464 v1(5474,4011)
  Bottom Layer w10: IC5.23 4251.52,4011 v1(5474,4011)
NetIC5_24: IC5.24 k6.2 | length 2967.7
  Bottom Layer w10: IC5.24 4252.52,3910 5444,3910 5474,3880 5474,2364 k6.2
NetIC5_27: IC5.27 k11.1 | length 1943.6
  Top Layer w10: k11.1 3983.96,1835 4018.96,1870 4018.96,3403.3 4030,3414.34 4030,3467.48 IC5.27
NetIC5_28: IC5.28 k11.4 | length 2006.9
  Top Layer w10: k11.4 3890,1935 3901,1924 3901,1914.76 3929.72,1886.04 3985,1886.04 3998.96,1900 3998.96,3456.04 v1(3990,3465)
  Bottom Layer w10: v1(3990,3465) 4075,3550 IC5.28
NetIC5_30: IC5.30 k11.5 | length 2274.8
  Top Layer w10: k11.5 3950,3640 3999,3689 4240,3689 4251,3678 4251,3388.48 IC5.30
NetIC5_33: IC5.33 k10.1 | length 2032.9
  Top Layer w10: IC5.33 4134,2971.48 4134,2007 4424,1717 4424,1239 k10.1
NetIC5_34: IC5.34 k10.2 | length 2249.4
  Top Layer w10: IC5.34 4154,2891.48 4154,2029 4444,1739 4444,1165 4420,1141 4326,1141 4326,1280 4336,1290 k10.2
NetIC5_35: IC5.35 k12.4 r22.1 | length 4225.2
  Top Layer w10: r22.1@2900,2270.55 2908,2270.55 2908,2054 2940,2022 2980,2022 3014,2056 3014,2310 3084,2380 ; v1(3189,1249) 3169,1269 3169,2367 3156,2380 3084,2380 ; v1(3245,2920) 3245,2626 3176,2557 3176,2472 3084,2380
  Bottom Layer w10: v1(3189,1249) 3189,1147 3240,1096 3691,1096 k12.4 ; v1(3245,2920) 4142.52,2920 IC5.35
NetIC5_36: IC5.36 k12.3 r21.1 | length 4819.5
  Top Layer w10: k12.3 3840,1180.98 3801,1219.98 3801,1860 3825,1884 3875,1884 3899,1860 3899,1778 3918,1759 3978,1759 4038.96,1819.96 4038.96,3013.96 4114,3089 4160,3089 ; r21.1 4060.55,1357 4094.32,1323.23 4163.15,1323.23 4163.15,1416 4114,1465.15 4114,3043 4160,3089 ; IC5.36 4212.52,2786 4251,2824.48 4251,3078 4240,3089 4160,3089
NetK2_2: K2.2 K?.12 K?.24 | length 1461.1
  Top Layer w10: K?.24 2182.36,4716.14 K?.12
  Bottom Layer w10: K2.2 1448,4662 1904.13,4662 2063,4820.87 K?.24
Netk3_2: k3.2 r2.1 r4.2 r9.2 r13.2 | length 1403.2
  Top Layer w10: r13.2 2689.45,1397.55 r9.2 2695,1310 r2.1 2845.55,1217.45 2885,1178 2885,1080 2901.77,1063.23 3182.96,1063.23 3202.73,1083 3250,1083 3250,1292 3260,1302 3284.45,1302 r4.2 3344.45,1250 k3.2
Netk8_1: k8.1 T?.3 | length 781.3
  Bottom Layer w10: k8.1 1293,1413 1848,1413 T?.3
Netk8_2: k8.2 T?.2 | length 573
  Bottom Layer w10: k8.2 1805,1350 T?.2
NetMos_1: Mos.1 R18.2 | length 493.3
  Top Layer w10: v1(1723,1955) 1739.45,1955 1794.45,1900 R18.2
  Bottom Layer w10: v1(1723,1955) 2075,1955 Mos.1
NetMos_2: Mos.2 T?.1 | length 937.3
  Top Layer w10: T?.1 1998,1363 1998,1968 Mos.2
Netr11_2: r11.2 r12.2 | length 439.1
  Top Layer w10: r11.2 2325,1088.42 2340,1073.42 2672.87,1073.42 2689.45,1090 r12.2
NetR17_1: R17.1 T2.2 T4.1 t5.2 | length 2047
  Top Layer w10: T4.1 1377,2243 1720.55,2243 R17.1
  Bottom Layer w10: T4.1 1270,2350 1730,2350 1780,2400 1780,2417 ; t5.2 1780,2417 ; T2.2 2295.37,2519 2135,2519 2023,2407 1790,2407 1780,2417
NetR18_1: R18.1 T2.3 t5.3 | length 1419.2
  Top Layer w10: R18.1 1725.55,1895 1688,1895 1663,1920 1663,2097 1755,2189 1755,2330 1830,2405 t5.3
  Bottom Layer w10: t5.3 1973,2588 2320,2588 2380,2528 T2.3
Netr19_2: r19.2 R20.2 T4.2 | length 5188.3
  Top Layer w10: T4.2 1190,2514.37 1190,2520 1120,2520 1100,2500 1100,2279 1760,1619 ; R20.2 1720.55,2013.62 1683,1976.07 1683,1930 1698,1915 1747,1915 1760,1902 1760,1619 ; r19.2 3734.45,1392.55 3720,1407 3572,1407 ; 1760,1619 1760,1045 1800,1005 3436,1005 ; 3436,1005 3482,1005 3541,1064 3541,1376 ; 3436,1005 3525,1094 3525,1360 3541,1376 ; 3541,1376 3572,1407 ; 3541,1376 3541,1396 3552,1407 3572,1407
VCC: b1.1 c1.1 Mos.3 R17.2 r30.2 T2.1 | length 3730.5
  Top Layer w10: R17.2 1789.45,2200 1839.45,2150 Mos.3 2080,2245 T2.1 2280,3113.7 c1.1 2326.3,4072.3 2695.55,4441.55 r30.2
  Bottom Layer w10: b1.1 1836.3,3650 c1.1
pads on no net: ic1.4 IC5.3 IC5.4 IC5.6 IC5.18 IC5.25 IC5.26 IC5.32 IC5.40 K?.14